# Altium PCB PCB1.PcbDoc
Units mm, origin at the board's own origin, x right, y up, seen from the top; angles counter-clockwise.
Board outline 100 x 100 mm, 2 copper layers (Top Layer, Bottom Layer), stack 0.58 mm thick; 6 components, 2 nets, 10 pads, 12 vias.
Unrouted connection lines stored in the file: 2.
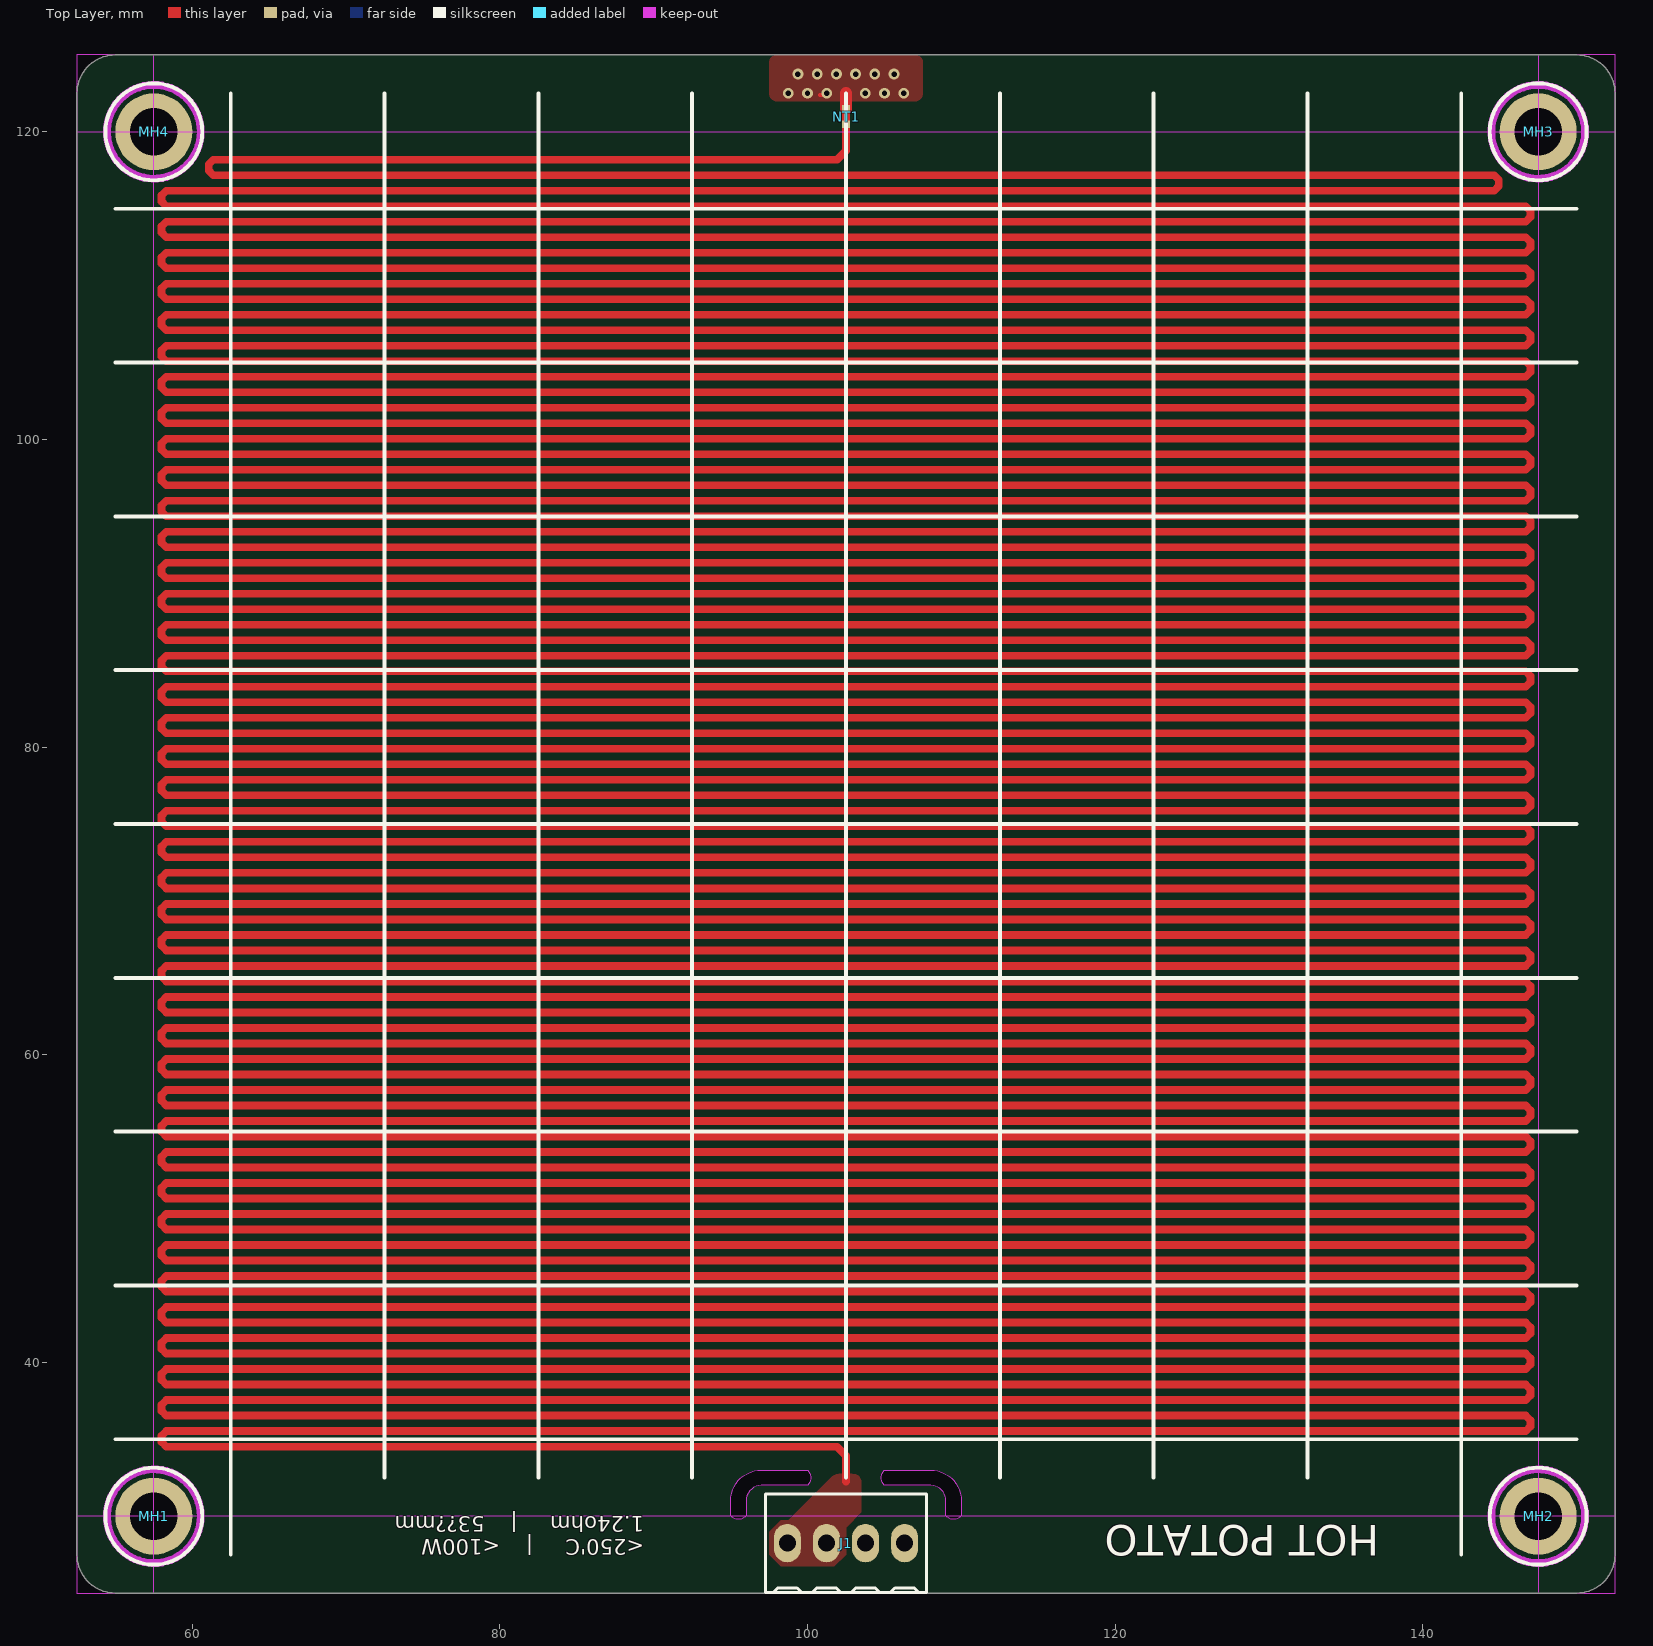
[diagram p0: Top Layer view]
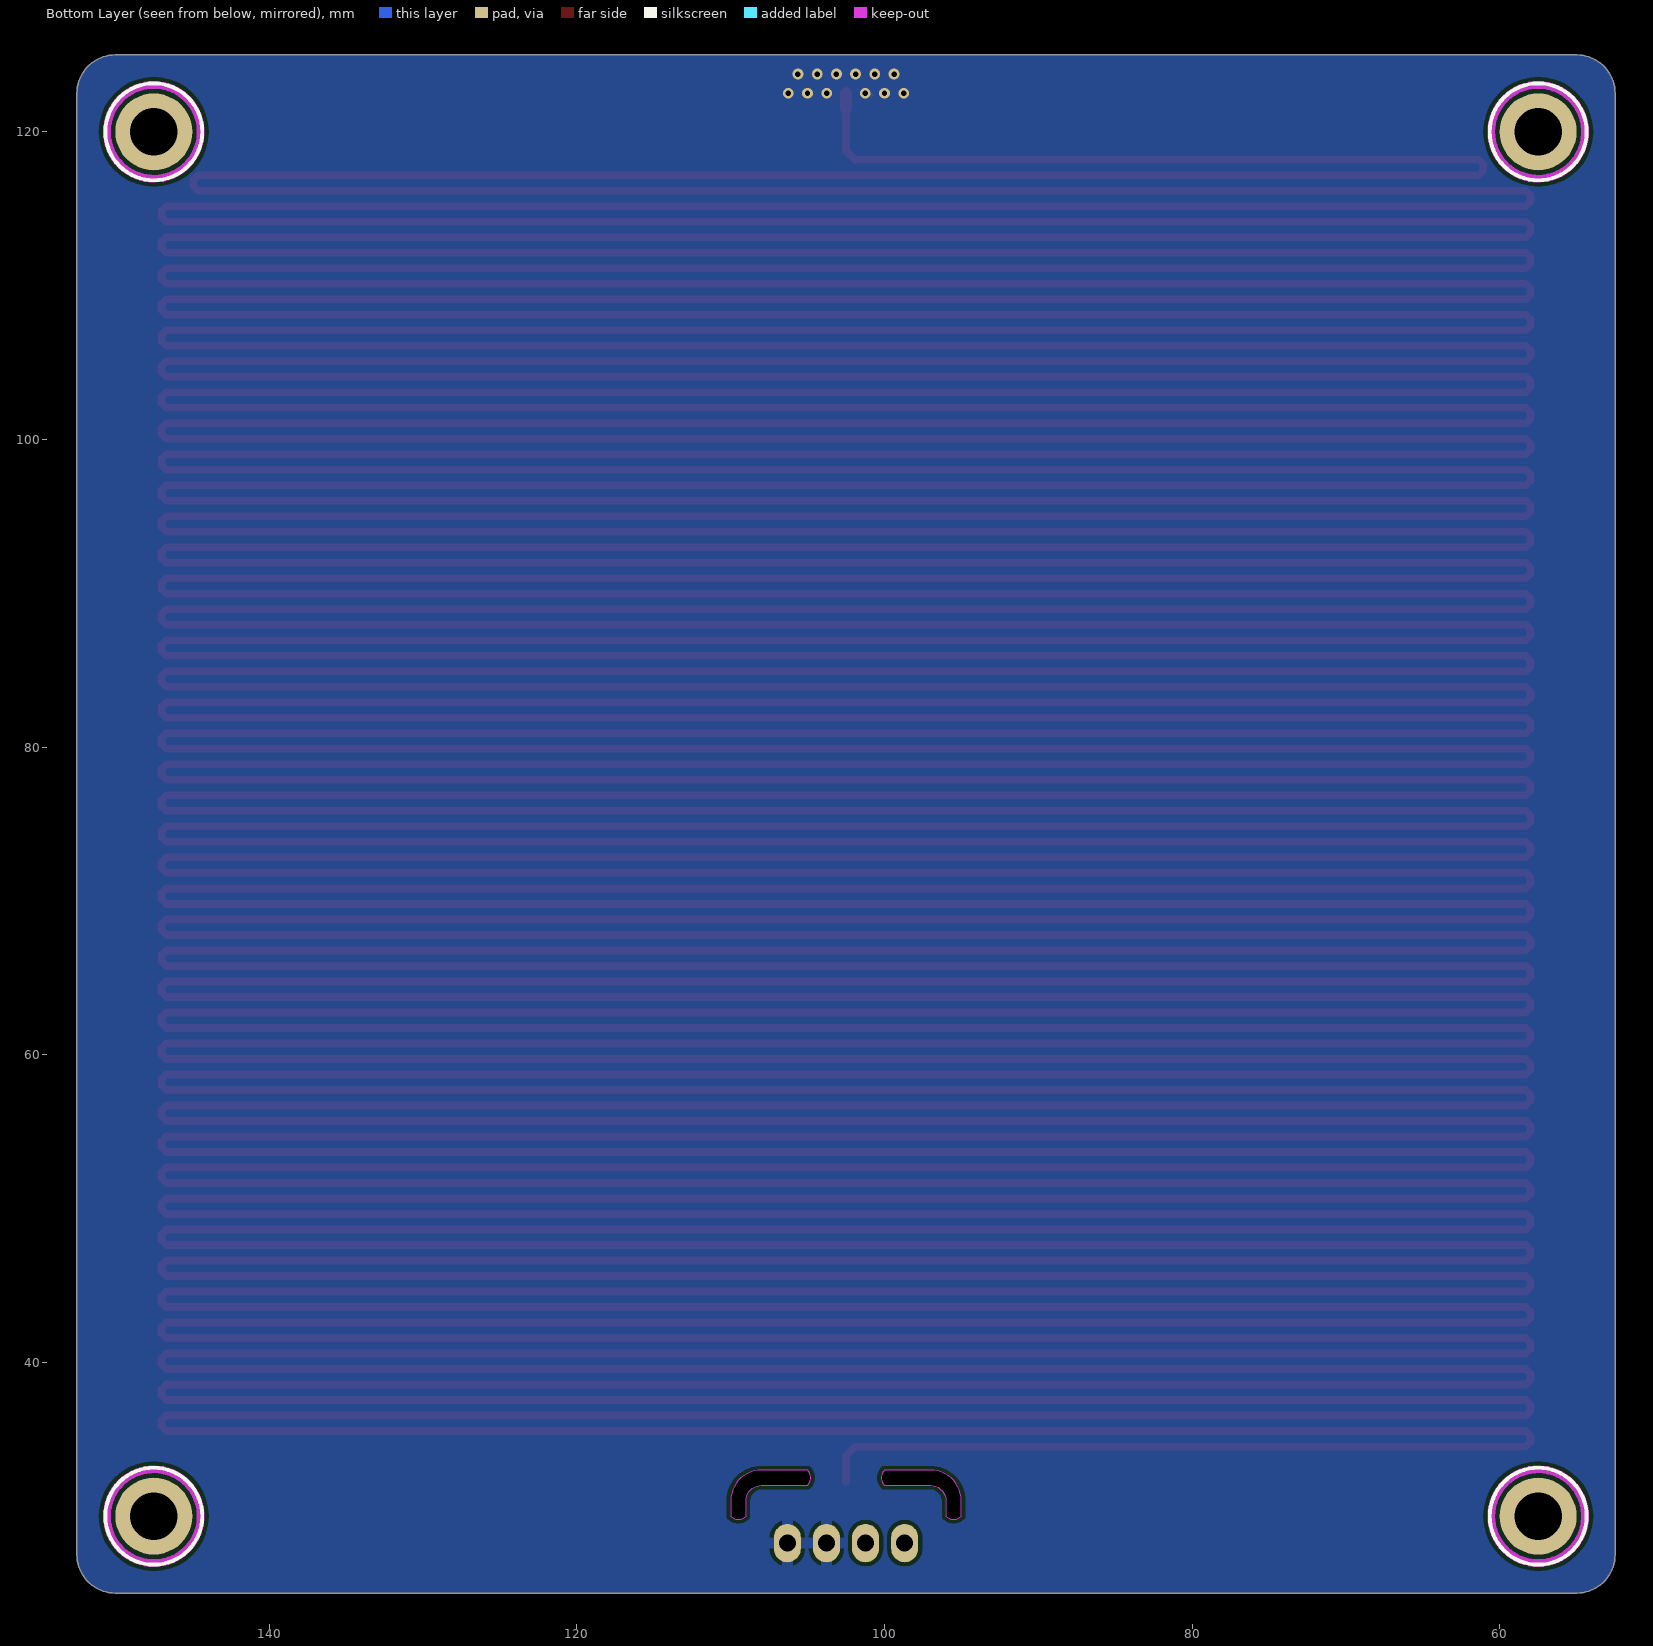
[diagram p1: Bottom Layer view, seen from below]

## Layer stack, top to bottom
Top Solder: solder mask 0.0102, Solder Resist, Dk 3.5
Top Layer: signal copper 0.0356
Dielectric 1: dielectric 0.509, FR-4, Dk 4.8
Bottom Layer: signal copper 0.0356
Bottom Solder: solder mask 0.0102, Solder Resist, Dk 3.5

## Board outline
52.5,27.5 ccw(c55,27.5) 55,25 150,25 ccw(c150,27.5) 152.5,27.5 152.5,122.5 ccw(c150,122.5) 150,125 55,125 ccw(c55,122.5) 52.5,122.5
cut-out: 95,30 95,31 cw(c97,31) 97,33 100,33 cw(c99.5,32.5) 100,32 97,32 ccw(c97,31) 96,31 96,30 cw(c95.5,30.5)
cut-out: 105,32 cw(c105.5,32.5) 105,33 108,33 cw(c108,31) 110,31 110,30 cw(c109.5,30.5) 109,30 109,31 ccw(c108,31) 108,32

## Design rules (kind name [scope] priority, off if disabled: settings)
Clearance [All] p1: gap=0.254 ignorepadtopadclearanceinfootprint=TRUE except(0: Arc-Hole Track-Hole SMDPad-Hole THPad-Hole Via-Hole Fill-Hole Poly-Hole Region-Hole Text-Hole)
PolygonConnect [All] p1: connectstyle=Relief reliefconductorwidth=0.254 reliefentries=4 polygonreliefangle="90 Angle" airgapwidth=0.254
RoutingVias [All] p1: holewidth=0.711 width=1.27 viastyle="Through Hole" minholewidth=0.711 minwidth=1.27 maxholewidth=0.711 maxwidth=1.27
SolderMaskExpansion [All] p1: expansion=0.102 istentingtop=FALSE
Width [All] p1: maxlimit=10 minlimit=0.254 preferedwidth=0.254 minimp=50.000000 maximp=50.000000 favimp=50.000000
30 further rules are at their usual default settings.

## Classes and differential pairs
net class HotPlate_Trace1: PWR

## Components (designator, comment, footprint, x,y, rotation, side; value= is the part's Value field where it differs from the comment)
J1 "282834-4" "TE 282834-4" 102.5,28.25 r180 top
MH1 "3mm" Mount-Hole_3mm 57.5,30 r0 top locked
MH2 "3mm" Mount-Hole_3mm 147.5,30 r0 top locked
MH3 "3mm" Mount-Hole_3mm 147.5,120 r0 top locked
MH4 "3mm" Mount-Hole_3mm 57.5,120 r0 top locked
NT1 "Net Tie" NetTie_20mil 102.5,121 r270 top

## Footprints (in the part's own frame and the unit in brackets; to place one, negate y for a bottom-side part, rotate by r counter-clockwise, add the part's x,y. Pads: shape width x height; smd on the part's side, far side on the other; paste and mask are expansions set on the pad)
Mount-Hole_3mm [mm]
  round 5 hole 3.1: 1(0,0)
  Keep-Out Layer circle w0.508: c0,0 r3.048
  silkscreen extent -3.15,-3.15 3.15,3.15, body extent -2.25,-2.6 2.25,2.6, height 4.19
NetTie_20mil [mil]
  rect 20x20 smd: 1(-19.37,0) 2(20,0)
  Top Layer region: -29.3,-10.22 30.01,-10.22 30.01,9.97 -29.3,9.97
"TE 282834-4" [mm]
  oval 1.75x2.5 hole 1.1: 1(-3.81,0) 2(-1.27,0) 3(1.27,0) 4(3.81,0)
  silkscreen extent -5.24,-3.2 5.24,3.2, body extent -5.31,-3.25 5.31,3.25, height 10

## Part data
J1: "TERM BLK 4P SIDE ENT 2.54MM PCB", Color=Green, Current=10A, Manufacturer="TE Connectivity AMP Connectors", Supplier Part Number 1=A98335-ND, Voltage=150V, ComponentLink1Description=Datasheet, ComponentLink1URL=https://www.te.com/commerce/DocumentDelivery/DDEController?Action=srchrtrv&DocNm=282834&DocType=Customer+Drawing&DocLang=English, ComponentLink2Description="DigiKey Link", ComponentLink2URL=http://digikey.com/product-detail/en/te-connectivity-amp-connectors/282834-4/A98335-ND/1153265, LastUpdated="2020-01-15 4:16:05 AM", Lifecycle Status=Active, Mating Orientation="Horizontal with Board", Minimum Order=1, Mounting Type="Through Hole", Number of Levels=1, Packaging=Bulk, Part Number=282834-4, Part Status=Active, Pitch="0.100\" (2.54mm)", Positions Per Level=4, Price=2.68, Series=Buchanan, Supplier 1=DigiKey, Wire Gauge="16-30 AWG", Wire Termination="Screw - Rising Cage Clamp"
MH1 MH2 MH3 MH4: library part Mount_Hole_3mm, "Mounting Hole 3mm plated"
NT1: library part NetTie, "Net Tie with 20mil trace"

## Via types
v1: diameter 0.7, hole 0.35, Top Layer to Bottom Layer, 12 vias

## Nets (pads, with @x,y where several pads share a name; then routed paths per layer and width w, separated by ;. In a path a pad name is that pad's centre, name@x,y a point inside that pad or via, vN(x,y) a via of type N, cw(c..) or ccw(c..) an arc to the next point about the centre after c; other vN are vias at no path point)
PWR: J1.3 J1.4 NT1.2 | length 7434.2
  Top Layer w0.5: 102.5,32.25 102.5,33.689 102.5,33.939 101.914,34.525 58.306,34.525 58.004,34.827 58.004,35.231 58.306,35.533 146.694,35.533 146.996,35.835 146.996,36.239 146.694,36.541 58.306,36.541 58.004,36.843 58.004,37.247 58.306,37.549 146.694,37.549 146.996,37.851 146.996,38.255 146.694,38.557 58.306,38.557 58.004,38.859 58.004,39.263 58.306,39.565 146.694,39.565 146.996,39.867 146.996,40.271 146.694,40.573 58.306,40.573 58.004,40.875 58.004,41.279 58.306,41.581 146.694,41.581 146.996,41.883 146.996,42.287 146.694,42.589 58.306,42.589 58.004,42.891 58.004,43.295 58.306,43.597 146.694,43.597 146.996,43.899 146.996,44.303 146.694,44.605 58.306,44.605 58.004,44.907 58.004,45.311 58.306,45.613 146.694,45.613 146.996,45.915 146.996,46.319 146.694,46.621 58.306,46.621 58.004,46.923 58.004,47.327 58.306,47.629 146.694,47.629 146.996,47.931 146.996,48.335 146.694,48.637 58.306,48.637 58.004,48.939 58.004,49.343 58.306,49.645 146.694,49.645 146.996,49.947 146.996,50.351 146.694,50.653 58.306,50.653 58.004,50.955 58.004,51.359 58.306,51.661 146.694,51.661 146.996,51.963 146.996,52.367 146.694,52.669 58.306,52.669 58.004,52.971 58.004,53.375 58.306,53.677 146.694,53.677 146.996,53.979 146.996,54.383 146.694,54.685 58.306,54.685 58.004,54.987 58.004,55.391 58.306,55.693 146.694,55.693 146.996,55.995 146.996,56.399 146.694,56.701 58.306,56.701 58.004,57.003 58.004,57.407 58.306,57.709 146.694,57.709 146.996,58.011 146.996,58.415 146.694,58.717 58.306,58.717 58.004,59.019 58.004,59.423 58.306,59.725 146.694,59.725 146.996,60.027 146.996,60.431 146.694,60.733 58.306,60.733 58.004,61.035 58.004,61.439 58.306,61.741 146.694,61.741 146.996,62.043 146.996,62.447 146.694,62.749 58.306,62.749 58.004,63.051 58.004,63.455 58.306,63.757 146.694,63.757 146.996,64.059 146.996,64.463 146.694,64.765 58.306,64.765 58.004,65.067 58.004,65.471 58.306,65.773 146.694,65.773 146.996,66.075 146.996,66.479 146.694,66.781 58.306,66.781 58.004,67.083 58.004,67.487 58.306,67.789 146.694,67.789 146.996,68.091 146.996,68.495 146.694,68.797 58.306,68.797 58.004,69.099 58.004,69.503 58.306,69.805 146.694,69.805 146.996,70.107 146.996,70.51 146.694,70.813 58.306,70.813 58.004,71.115 58.004,71.518 58.306,71.821 146.694,71.821 146.996,72.123 146.996,72.526 146.694,72.829 58.306,72.829 58.004,73.131 58.004,73.534 58.306,73.837 146.694,73.837 146.996,74.139 146.996,74.542 146.694,74.845 58.306,74.845 58.004,75.147 58.004,75.55 58.306,75.853 146.694,75.853 146.996,76.155 146.996,76.558 146.694,76.861 58.306,76.861 58.004,77.163 58.004,77.566 58.306,77.869 146.694,77.869 146.996,78.171 146.996,78.574 146.694,78.877 58.306,78.877 58.004,79.179 58.004,79.582 58.306,79.885 146.694,79.885 146.996,80.187 146.996,80.59 146.694,80.893 58.306,80.893 58.004,81.195 58.004,81.598 58.306,81.901 146.694,81.901 146.996,82.203 146.996,82.606 146.694,82.909 58.306,82.909 58.004,83.211 58.004,83.614 58.306,83.917 146.694,83.917 146.996,84.219 146.996,84.622 146.694,84.925 58.306,84.925 58.004,85.227 58.004,85.63 58.306,85.933 146.694,85.933 146.996,86.235 146.996,86.638 146.694,86.941 58.306,86.941 58.004,87.243 58.004,87.646 58.306,87.949 146.694,87.949 146.996,88.251 146.996,88.654 146.694,88.957 58.306,88.957 58.004,89.259 58.004,89.662 58.306,89.965 146.694,89.965 146.996,90.267 146.996,90.67 146.694,90.973 58.306,90.973 58.004,91.275 58.004,91.678 58.306,91.981 146.694,91.981 146.996,92.283 146.996,92.686 146.694,92.989 58.306,92.989 58.004,93.291 58.004,93.694 58.306,93.997 146.694,93.997 146.996,94.299 146.996,94.702 146.694,95.005 58.306,95.005 58.004,95.307 58.004,95.71 58.306,96.013 146.694,96.013 146.996,96.315 146.996,96.718 146.694,97.021 58.306,97.021 58.004,97.323 58.004,97.726 58.306,98.029 146.694,98.029 146.996,98.331 146.996,98.734 146.694,99.037 58.306,99.037 58.004,99.339 58.004,99.742 58.306,100.045 146.694,100.045 146.996,100.347 146.996,100.75 146.694,101.053 58.306,101.053 58.004,101.355 58.004,101.758 58.306,102.061 146.694,102.061 146.996,102.363 146.996,102.766 146.694,103.069 58.306,103.069 58.004,103.371 58.004,103.774 58.306,104.077 146.694,104.077 146.996,104.379 146.996,104.782 146.694,105.085 58.306,105.085 58.004,105.387 58.004,105.79 58.306,106.093 146.694,106.093 146.996,106.395 146.996,106.798 146.694,107.101 58.306,107.101 58.004,107.403 58.004,107.806 58.306,108.109 146.694,108.109 146.996,108.411 146.996,108.814 146.694,109.117 58.306,109.117 58.004,109.419 58.004,109.822 58.306,110.125 146.694,110.125 146.996,110.427 146.996,110.83 146.694,111.133 58.306,111.133 58.004,111.435 58.004,111.838 58.306,112.141 146.694,112.141 146.996,112.443 146.996,112.846 146.694,113.149 58.306,113.149 58.004,113.451 58.004,113.854 58.306,114.157 146.694,114.157 146.996,114.459 146.996,114.862 146.694,115.165 58.306,115.165 58.004,115.467 58.004,115.87 58.306,116.173 144.634,116.173 144.937,116.475 144.937,116.878 144.634,117.181 61.374,117.181 61.071,117.483 61.071,117.886 61.374,118.189 101.914,118.189 102.5,118.775 102.5,119.992 NT1.2
RETURN: J1.1 J1.2 NT1.1 | length 1.3
  Top Layer w0.254: 100.8,122.4 100.921,122.4 v1@101.021,122.5
  Top Layer w0.8: NT1.1 102.5,122.5
  other v1: 98.75,122.5 100,122.5 101.25,122.5 103.75,122.5 105,122.5 106.25,122.5 99.375,123.75 100.625,123.75 101.875,123.75 103.125,123.75 104.375,123.75 105.625,123.75
pads on no net: MH1.1 MH2.1 MH3.1 MH4.1

## Polygon pours and split planes (outlines as drawn)
PWR on Top Layer "PWR_L01_P004" (solid, pour order 4): 101.493,32.508 101.5,32.5 98.75,29.75 98.25,29.75 97.5,29 97.5,27.5 98.25,26.75 101.75,26.75 102.5,27.5 102.5,29.25 103.5,30.25 103.5,32.198 ccw(c102.954,32.198) 103.055,32.735 ccw(c102.897,31.897) 102.896,32.75 102.103,32.75 ccw(c102.103,31.859)
RETURN on Top Layer "RETURN_L01_P002" (solid, pour order 2): 98,125 107,125 cw(c107,124.5) 107.5,124.5 107.5,122.5 cw(c107,122.5) 107,122 98,122 cw(c98,122.5) 97.5,122.5 97.5,124.5 cw(c98,124.5)
RETURN on Bottom Layer "RETURN_L02_P001" (solid, pour order 1): 55,125 150,125 cw(c150,122.5) 152.5,122.5 152.5,27.5 cw(c150,27.5) 150,25 55,25 cw(c55,27.5) 52.5,27.5 52.5,122.5 cw(c55,122.5)

## Keep-outs
Top Layer:
  region: 52.5,120 152.5,120 152.5,125 52.5,125
  region: 52.5,25 152.5,25 152.5,30 52.5,30
  region: 147.5,125 147.5,25 152.5,25 152.5,125
  region: 52.5,125 52.5,25 57.5,25 57.5,125

## Silkscreen, mask and mechanical layers (free items; w line width, h text height)
Top Overlay:
  lines w0.254: 55,35 150,35 ; 55,45 150,45 ; 55,55 150,55 ; 55,65 150,65 ; 55,75 150,75 ; 55,85 150,85 ; 55,95 150,95 ; 55,105 150,105 ; 55,115 150,115 ; 62.5,27.5 62.5,122.5 ; 72.5,32.5 72.5,122.5 ; 82.5,32.5 82.5,122.5 ; 92.5,32.5 92.5,122.5 ; 102.5,32.5 102.5,122.5 ; 112.5,32.5 112.5,122.5 ; 122.5,32.5 122.5,122.5 ; 132.5,32.5 132.5,122.5 ; 142.5,27.5 142.5,122.5
  text "<250'C     |    <100W / 1.24ohm     |    53??mm" at 89.375,30 h1 r180
  text "HOT POTATO" at 137.164,29.4 h2 r180
Dimensions:
  lines w0.254: 52.5,75 152.5,75 ; 102.5,25 102.5,125 ; 152.5,25 52.5,125 ; 52.5,25 152.5,125 ; 52.5,25 52.5,25 ; 52.5,125 52.5,125 ; 52.5,125 52.5,125 ; 152.5,125 152.5,125
Board:
  lines w0.254: 52.5,27.5 ccw(c55,27.5) 55,25 150,25 ccw(c150,27.5) 152.5,27.5 152.5,122.5 ccw(c150,122.5) 150,125 55,125 ccw(c55,122.5) 52.5,122.5 52.5,27.5 ; 95,30 ccw(c95.5,30.5) 96,30 96,31 cw(c97,31) 97,32 100,32 ccw(c99.5,32.5) 100,33 97,33 ccw(c97,31) 95,31 95,30 ; 105,32 cw(c105.5,32.5) 105,33 108,33 cw(c108,31) 110,31 110,30 cw(c109.5,30.5) 109,30 109,31 ccw(c108,31) 108,32 105,32
Formula:
  text "Setting Trace Length and Width: /  Trace Length: PCB panel -> NET name PWR -> \"Routed Length\" /                Adj: Select Hotplate traces -> Tweak \"Space\" /  Trace Width: Select Base or tale of track -> properties -> \"Width\" /                Adj: Select Hotplate Traces -> *DELETE* -> Change Width -> \"Interactively tune Trace Length:" at 160,122.5 h1.52

## Dimensions
57.5,30 to 57.5,120 on Dimensions
57.5,120 to 147.5,120 on Dimensions
55,105 to 55,115 on Top Overlay
62.5,122.5 to 72.5,122.5 on Top Overlay
57.5,120 to 55,125 on Dimensions
57.5,120 to 52.5,122.5 on Dimensions
52.5,25 to 52.5,125 on Dimensions
52.5,125 to 152.5,125 on Dimensions